# Altium PCB optoPCB.PcbDoc
Units mm, origin at the board's own origin, x right, y up, seen from the top; angles counter-clockwise.
Board outline 100 x 50 mm, 2 copper layers (Top Layer, Bottom Layer); 43 components, 22 nets, 107 pads, 16 vias.
Unrouted connection lines stored in the file: 2.
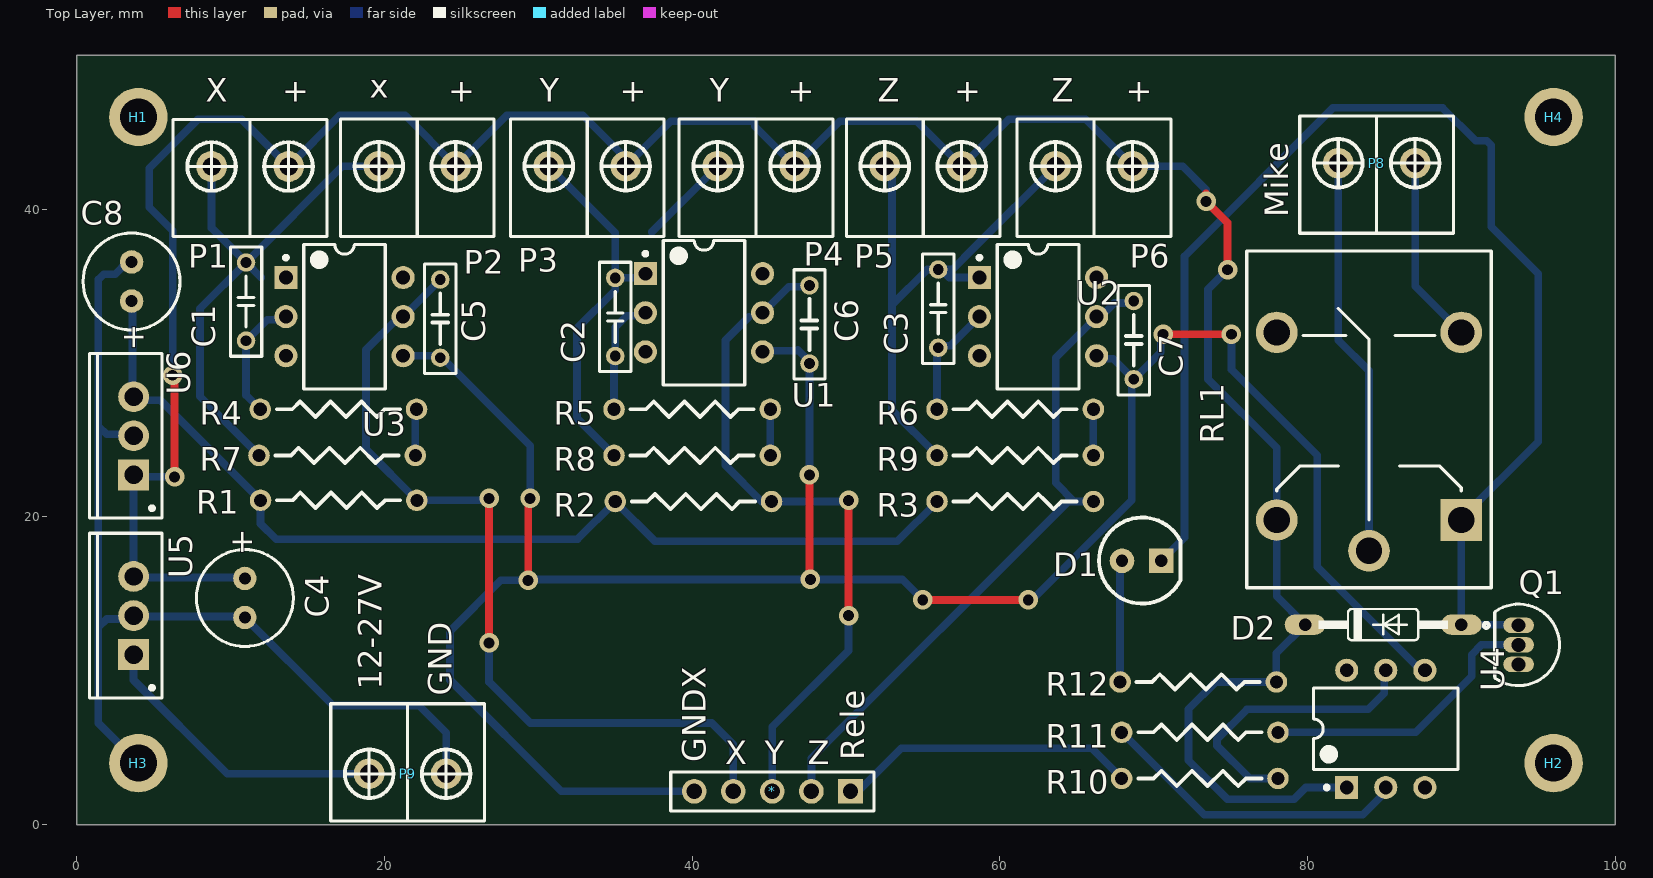
[diagram p0: Top Layer view]
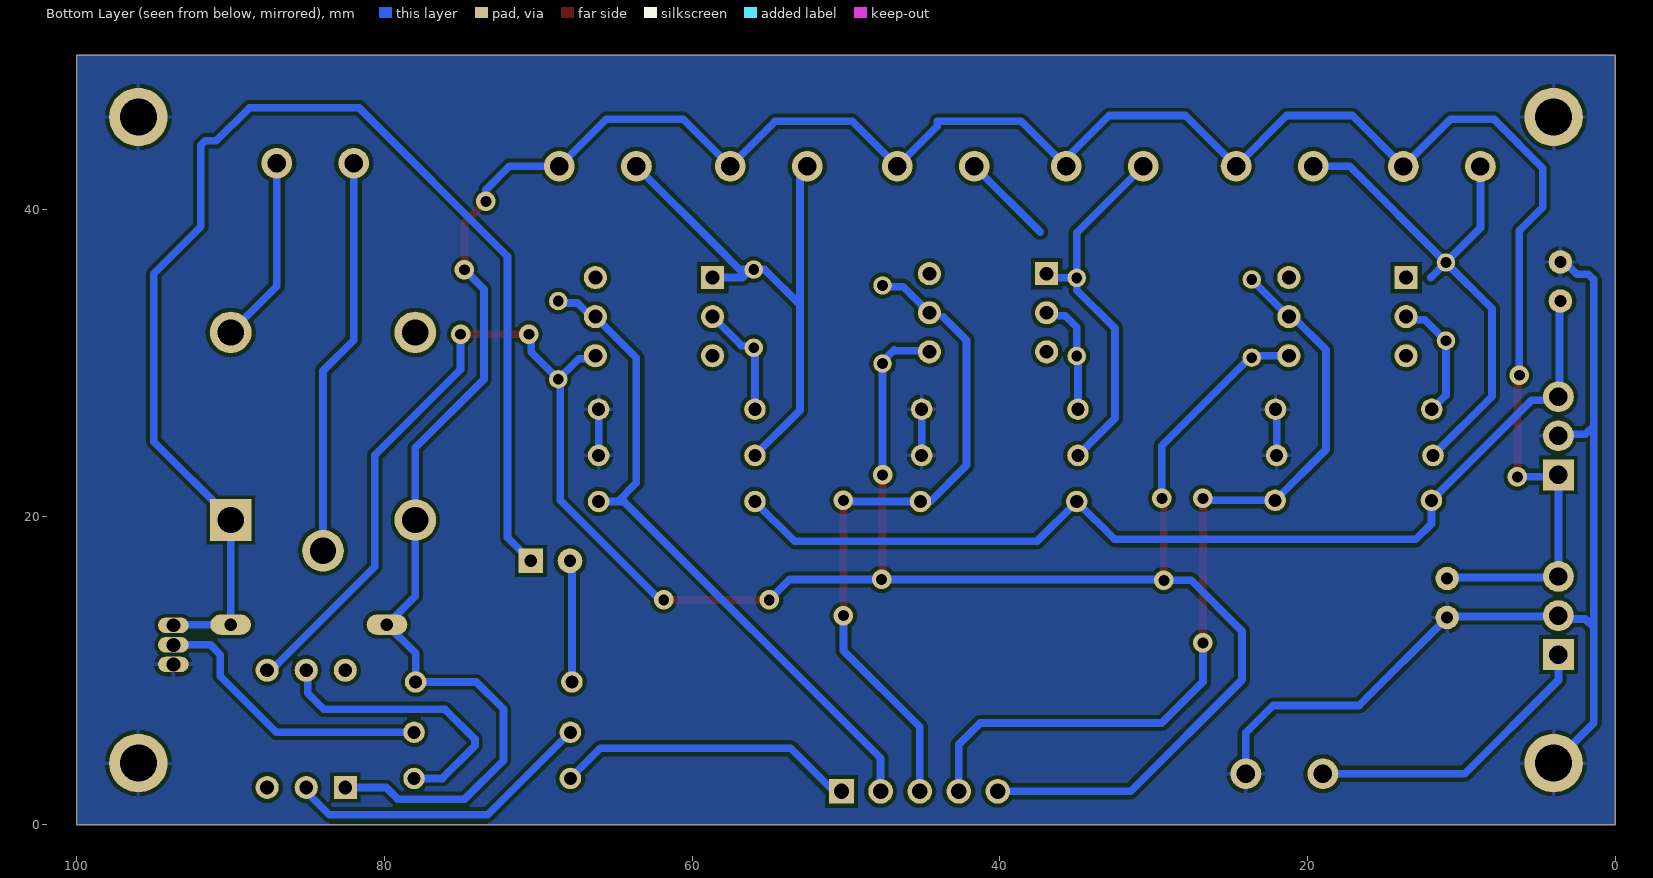
[diagram p1: Bottom Layer view, seen from below]
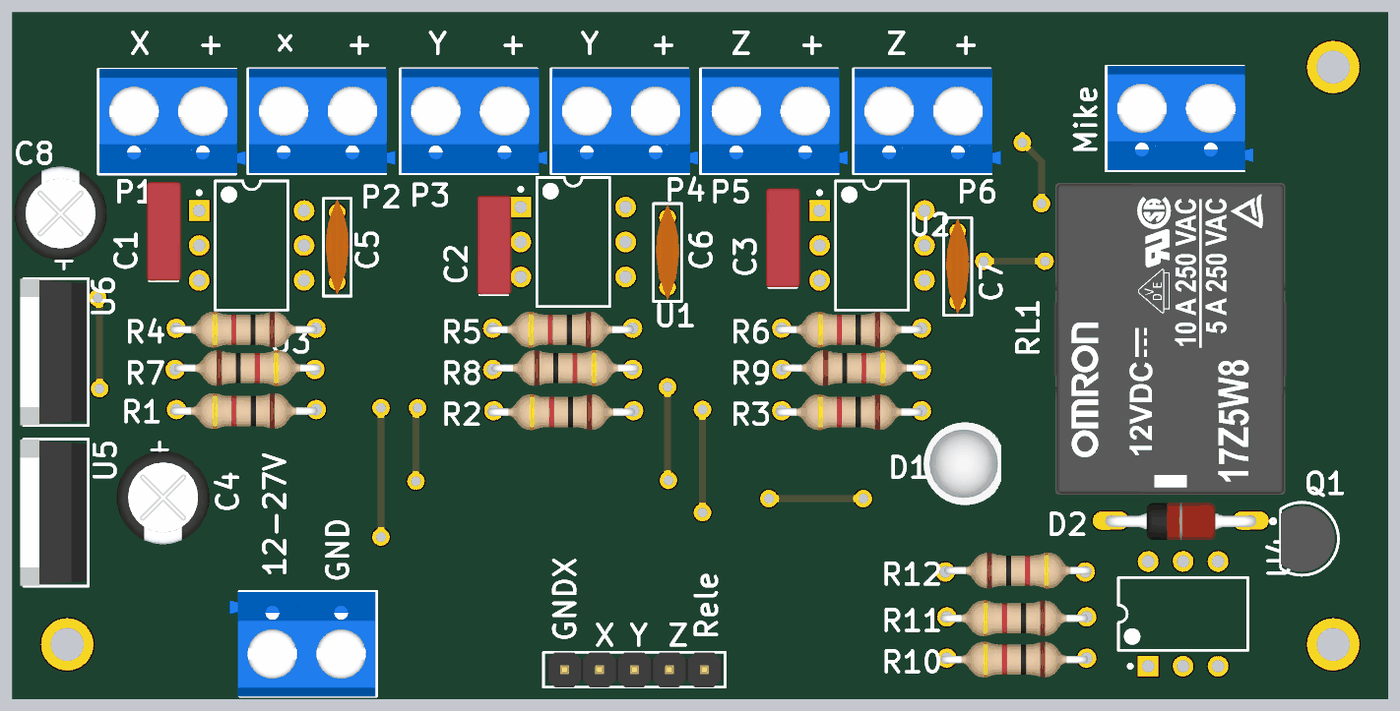
[diagram p2: 3D render of the assembled board from above, using the file's embedded part models]

## Layer stack, top to bottom
Top Solder: solder mask 0.0102, Solder Resist, Dk 3.5
Top Layer: signal copper 0.0356
Dielectric 1: dielectric 0.32, FR-4, Dk 4.8
Bottom Layer: signal copper 0.0356
Bottom Solder: solder mask 0.0102, Solder Resist, Dk 3.5

## Board outline
0,0 0,50 100,50 100,0

## Design rules (kind name [scope] priority, off if disabled: settings)
Clearance [All] p1: gap=0.254 ignorepadtopadclearanceinfootprint=FALSE except(0: Arc-Hole Track-Hole SMDPad-Hole THPad-Hole Via-Hole Fill-Hole Poly-Hole Region-Hole Text-Hole)
ComponentClearance [All] p1: gap=0.01 collisioncheckmode=3 verticalgap=0.254 showdistances=FALSE
PolygonConnect [All] p1: connectstyle=Relief reliefconductorwidth=0.254 reliefentries=4 polygonreliefangle="90 Angle" airgapwidth=0.254
RoutingVias [All] p1: holewidth=0.711 width=1.27 viastyle="Through Hole" minholewidth=0.711 minwidth=1.27 maxholewidth=0.711 maxwidth=1.27
SolderMaskExpansion [All] p1: expansion=0.102 istentingtop=FALSE
Width [All] p1: maxlimit=1.2 minlimit=0.3 preferedwidth=0.5
29 further rules are at their usual default settings.

## Components (designator, comment, footprint, x,y, rotation, side; value= is the part's Value field where it differs from the comment)
* "Header 5" HDR1X5M 50.292,2.159 r180 top
C1 "10n" Capaciotrpoliester 11,34 r90 top value=1
C2 "10n" Capaciotrpoliester 35,33 r90 top value=1
C3 "10n" Capaciotrpoliester 56,33.54 r90 top value=1
C4 "100uF" cap_rad_d6.3X11POL 10.922,14.732 r270 top
C5 "10n" RAD-0.2 23.622,32.893 r90 top value=1
C6 "10n" RAD-0.2 47.625,32.512 r90 top value=1
C7 "10n" RAD-0.2 68.707,31.496 r90 top value=1
C8 "100uF" cap_rad_d6.3X11POL 3.556,35.306 r90 top
D1 "LED" LED_5MM_GREEN 67.945,17.145 r0 top
D2 "1n4148" DIODO 79.84,13 r0 top
H1 "Hole" HOLE_M2#1 122.781,40.776 r0 top
H2 "Hole" HOLE_M2#2 96.901,3.556 r0 top
H3 "Hole" HOLE_M2#3 3.175,2.54 r0 top
H4 "Hole" HOLE_M2#4 97,47 r0 top
P1 "X+" KRE-2 16.256,46.482 r180 top
P2 "X-" KRE-2 27.129,46.499 r180 top
P3 "Y+" KRE-2 38.178,46.499 r180 top
P4 "Y-" KRE-2 49.156,46.499 r180 top
P5 "Z+" KRE-2 60.022,46.499 r180 top
P6 "Z-" KRE-2 71.127,46.499 r180 top
P8 "Mike" KRE-2 89.5,46.7 r180 top
P9 "Alimentacao" KRE-2 16.503,-0.398 r0 top
Q1 "NPN" TO-92 93.726,11.684 r180 top
R1 "10k" AXIAL-0.4 17.018,21.082 r180 top value=0
R2 "10k" AXIAL-0.4 40.08,21 r180 top value=0
R3 "10k" AXIAL-0.4 61,21 r180 top value=0
R4 "1k" AXIAL-0.4 17,27 r180 top value=0
R5 "1k" AXIAL-0.4 40,27 r180 top value=0
R6 "1k" AXIAL-0.4 61,27 r180 top value=0
R7 "10k" AXIAL-0.4 16.92,24 r0 top value=0
R8 "10k" AXIAL-0.4 40,24 r0 top value=0
R9 "10k" AXIAL-0.4 61,24 r0 top value=0
R10 "200" AXIAL-0.4 73,3 r180 top value=0
R11 "1k" AXIAL-0.4 73,6 r180 top value=0
R12 "1k" AXIAL-0.4 72.898,9.271 r0 top value=0
RL1 "Relay" FINDER-36.11 90,19.8 r90 top
U1 "4n27" DIP-6 40.767,33.274 r0 top
U2 "4n27" DIP-6 62.484,33.02 r0 top
U3 "4n27" DIP-6 17.399,33.02 r0 top
U4 "Optoisolator1" DIP-6 85.09,6.223 r90 top
U5 "LM7812" LM7805 3.683,13.589 r90 top
U6 "LM7812" LM7805 3.683,25.273 r90 top

## Footprints (in the part's own frame and the unit in brackets; to place one, negate y for a bottom-side part, rotate by r counter-clockwise, add the part's x,y. Pads: shape width x height; smd on the part's side, far side on the other; paste and mask are expansions set on the pad)
AXIAL-0.4 [mm]
  round 1.4 hole 0.85: 1(-5.08,0) 2(5.08,0)
  silkscreen extent -4,-0.5 4,0.5, body extent -5.15,-1.19 5.55,1.4, height 2.69
cap_rad_d6.3X11POL [mil]
  round 60 hole 30: 1(-50,0) 2(50,0)
  silkscreen extent -124,-124 124,124, body extent -132,-132 136,136, height 492
Capaciotrpoliester [mm] "CAP_BOX_7.2x2.5x6.5_RD"
  round 1.2 hole 0.7: 1(-2.54,0) 2(2.54,0)
  silkscreen extent -3.56,-1.02 3.56,1.02, body extent -3.56,-1.27 3.64,1.23, height 6.5
DIODO [mil]
  oval 104x52 hole 32: 1(400,0) 2(0,0)
  silkscreen extent 35,-40 365,40, body extent -15,-55 416,51, height 244
DIP-6 [mm] "DIP, 6-Pin, Row Spacing 7.62 mm, Pitch 2.54 mm"
  rect 1.5x1.5 hole 0.9: 1(-3.81,2.54)
  round 1.5 hole 0.9: 2(-3.81,0) 3(-3.81,-2.54) 4(3.81,-2.54) 5(3.81,0) 6(3.81,2.54)
  silkscreen extent -3.93,-4.7 2.65,4.7, body extent -3.55,-4.7 3.55,4.7, height 5.46
FINDER-36.11 [mm]
  rect 2.7x2.7 hole 1.7: 1(0,0)
  round 2.7 hole 1.7: 2(12.2,12) 3(12.2,0) 4(0,12) 5(-2,6)
  silkscreen extent -4.4,-1.95 17.5,13.95, body extent -4.92,-2.61 17.78,14.29, height 19
HDR1X5M [mm]
  rect 1.6x1.6 hole 1: 1(0,0)
  round 1.6 hole 1.016: 2(2.54,0) 3(5.08,0) 4(7.62,0) 5(10.16,0)
  silkscreen extent -1.52,-1.27 11.68,1.27, body extent -1.27,-1.27 11.43,1.27, height 8.6
HOLE_M2#1 [mm]
  round 3.8 hole 2.4: 1(-118.781,5.224)
HOLE_M2#2 [mm]
  round 3.8 hole 2.4: 1(-0.901,0.444)
HOLE_M2#3 [mm]
  round 3.8 hole 2.4: 1(0.825,1.46)
HOLE_M2#4 [mm]
  round 3.8 hole 2.4: 1(-1,-1)
KRE-2 [mm]
  round 2 hole 1.2: 1(2.491,3.7) 2(7.5,3.7)
  silkscreen extent 0,0.64 10,8.26, body extent -0.7,0.6 9.9,8.2, height 10
LED_5MM_GREEN [mm] "Led 5 mm"
  round 1.6 hole 0.8: 1(0,0)
  rect 1.6x1.6 hole 0.8: 2(2.54,0)
  silkscreen extent -1.49,-2.78 3.81,2.82, body extent -1.71,-3.01 3.71,3.01, height 8.81
LM7805 [mm]
  rect 2x2 hole 1.2: 1(-2.54,0)
  round 2 hole 1.2: 2(0,0) 3(2.54,0)
  silkscreen extent -5.35,-1.85 5.35,2.85, body extent -5.32,-1.7 5.33,3.1, height 19.5
RAD-0.2 [mm]
  round 1.2 hole 0.7: 1(-2.54,0) 2(2.54,0)
  silkscreen extent -3.56,-1.02 3.56,1.02, body extent -3.5,-0.85 3.5,0.85, height 7.31
TO-92 [mm] "TO, Flat Index; 3 In-Line, Axial Leads; Body Dia. 4.8mm; Leads 0.48 x 0.51 mm (max)"
  oval 2x1 hole 0.9: 1(0,-1.27) 2(0,0) 3(0,1.27)
  silkscreen extent -2.65,-2.65 2.26,2.65, body extent -2.4,-2.4 1.53,2.4, height 6

## Part data
C1 C2 C3 C5 C6 C7: library part C, "Capacitor"
C4 C8: library part CP, "Polarized Capacitor"
D2: library part D, "Diode"
P1 P2 P3 P4 P5 P6 P8 P9: library part "Header 2"
Q1: "NPN Bipolar Transistor"
R1 R2 R3 R4 R5 R6 R7 R8 R9 R10 R11 R12: library part R, "Resistor"
RL1: "SPDT Relay"
U1 U2 U3: library part Optoisolator1, "4-Pin Phototransistor Optocoupler"
U4: "4-Pin Phototransistor Optocoupler"
U5 U6: library part LM7805

## Via types
v1: diameter 1.27, hole 0.711, Top Layer to Bottom Layer, 16 vias

## Nets (pads, with @x,y where several pads share a name; then routed paths per layer and width w, separated by ;. In a path a pad name is that pad's centre, name@x,y a point inside that pad or via, vN(x,y) a via of type N, cw(c..) or ccw(c..) an arc to the next point about the centre after c; other vN are vias at no path point)
+5: C8.1 R1.2 R2.2 R3.2 U6.3 | length 66.4
  Bottom Layer w0.5: C8.1 3.62,33.972 3.62,27.877 U6.3 3.909,27.587 5.433,27.587 R1.2 11.938,19.558 12.954,18.542 32.542,18.542 R2.2 37.585,18.415 53.335,18.415 R3.2
+12: C4.1 D2.2 P1.1 P2.1 P3.1 P4.1 P5.1 P6.1 R12.2 RL1.4 U4.1 U5.3 U6.1 | length 180.9
  Top Layer w0.5: v1(6.223,29.21) 6.35,29.083 v1(6.35,22.606) ; v1@73.406,41.021 v1(73.406,40.513) 74.803,39.116 v1(74.803,36.068)
  Bottom Layer w0.5: v1(6.223,29.21) 6.223,38.608 4.699,40.132 4.699,42.672 7.874,45.847 10.7,45.847 P1.1 17.084,46.101 21.336,46.101 P2.1 27.94,46.101 32.893,46.101 35.687,43.307 P3.1 38.608,45.72 44.069,45.72 44.069,45.395 P4.1 49.586,45.72 54.61,45.72 P5.1 60.579,45.847 65.588,45.847 P6.1 71.882,42.799 73.406,41.275 v1(73.406,40.513) ; v1(6.35,22.606) 3.81,22.606 U6.1 U5.3 3.747,16.066 C4.1@10.859,16.066 ; v1(74.803,36.068) 73.533,34.798 73.533,28.956 78,24.489 RL1.4 78,14.84 D2.2 77.978,11.138 R12.2 74.041,9.271 72.263,7.493 72.263,4.191 74.803,1.651 79.125,1.651 79.887,2.413 U4.1
GND: C4.2 C8.2 H1.1 H2.1 H3.1 H4.1 P9.2 Q1.3 R4.1 R5.1 R6.1 R7.2 R8.2 R9.2 U5.2 U6.2 | length 75.8
  Bottom Layer w0.5: C8.2 3.279,36.576 2.489,35.787 1.751,35.787 1.397,35.433 1.397,25.908 ; U6.2 3.584,25.372 1.933,25.372 1.397,25.908 ; H3.1 1.397,6.603 1.397,12.827 ; R4.1 22,26.92 R7.2 R7.2@22.244,24 ; P9.2 24.003,5.969 22.225,7.747 16.637,7.747 C4.2 10.859,13.526 3.747,13.526 U5.2 3.457,13.363 1.933,13.363 1.397,12.827 ; R5.1@45,27.08 R5.1 R8.2 ; R9.2 R6.1 ; 1.397,12.827 1.397,25.908
GNDX: *.5 C5.1 C6.1 C7.1 U1.4 U2.4 U3.4 U4.4 | length 154.6
  Top Layer w0.5: v1(29.337,15.875) 29.337,21.082 v1(29.464,21.209) ; v1(47.625,22.733) 47.625,16.002 v1(47.688,15.939) ; v1(54.991,14.605) v1(61.849,14.605) ; v1(70.612,31.877) v1(75.057,31.877)
  Bottom Layer w0.5: U3.4 23.622,30.48 29.464,24.638 v1(29.464,21.209) ; C5.1@23.488,30.487 C5.1 ; *.5 31.496,2.159 24.257,9.398 24.257,12.573 27.559,15.875 v1(29.337,15.875) 29.4,15.939 v1(47.688,15.939) 53.657,15.939 v1(54.991,14.605) ; U1.4 44.64,30.797 46.799,30.797 46.863,30.861 47.625,30.099 v1(47.625,22.733) ; v1(61.849,14.605) 62.103,14.605 68.58,21.082 C7.1@68.58,28.956 ; U2.4 66.485,30.289 67.374,30.289 C7.1 70.465,30.714 70.465,31.73 v1(70.612,31.877) ; v1(75.057,31.877) 75.057,29.591 80.645,24.003 80.645,16.764 87.376,10.033 U4.4
Net*_1: *.1 R10.2 | length 19.6
  Bottom Layer w0.5: *.1 50.8,2.159 53.594,4.953 65.967,4.953 R10.2
Net*_2: *.2 C7.2 R3.1 U2.5 | length 43.9
  Bottom Layer w0.5: *.2 47.752,4.318 64.434,21 64.852,21 ; R3.1 64.852,21 ; C7.2 68.573,33.902 67.447,33.902 66.565,33.02 U2.5 63.627,30.353 63.627,22.225 64.852,21
Net*_3: *.3 C6.2 R2.1 U1.5 | length 44
  Top Layer w0.5: v1(50.165,13.589) v1(50.165,21.082)
  Bottom Layer w0.5: 43.668,33 42.164,31.496 42.164,23.368 44.532,21 R2.1 50.083,21 v1(50.165,21.082) ; U1.5 46.275,34.972 47.545,34.972 C6.2 ; *.3 45.212,6.35 50.165,11.303 v1(50.165,13.589)
Net*_4: *.4 C5.2 R1.1 U3.5 | length 55.2
  Top Layer w0.5: v1(26.797,11.811) v1(26.797,21.209)
  Bottom Layer w0.5: C5.2 U3.5 20.955,33.02 18.796,30.861 18.796,24.384 R1.1 26.67,21.082 v1(26.797,21.209) ; v1(26.797,11.811) 26.797,9.271 29.464,6.604 41.275,6.604 42.672,5.207 *.4
NetC1_1: C1.1 R4.2 U3.2 | length 8.1
  Bottom Layer w0.5: R4.2 11,27.92 C1.1 12.369,32.829 13.398,32.829 U3.2
NetC1_2: C1.2 P1.2 P2.2 R7.1 U3.1 | length 35.2
  Bottom Layer w0.5: P1.2 8.756,38.784 C1.2 ; R7.1 8,27.84 8,33.54 C1.2 ; 11.98,35.56 C1.2 ; P2.2 17.259,42.799 C1.2
NetC2_1: C2.1 R5.2 U1.2 | length 7.7
  Bottom Layer w0.5: R5.2 34.92,30.38 C2.1 35,32.333 35.75,33.083 36.766,33.083 U1.2
NetC2_2: C2.2 P3.2 P4.2 R8.1 U1.1 | length 30.7
  Bottom Layer w0.5: P3.2 35,38.477 C2.2 ; R8.1 32.512,26.408 32.512,32.258 35,34.746 C2.2 ; U1.1 36.683,35.54 C2.2 ; 37.38,38.523 P4.2
NetC3_1: C3.1 R6.2 U2.2 | length 7.5
  Bottom Layer w0.5: R6.2 55.92,30.92 C3.1 56.134,31.134 56.788,31.134 U2.2
NetC3_2: C3.2 P5.2 P6.2 R9.1 U2.1 | length 37.5
  Bottom Layer w0.5: P5.2 52.991,42.33 52.991,33.782 ; R9.1 52.991,26.929 52.991,33.782 ; U2.1 56.709,35.56 56.189,36.08 C3.2 ; P6.2 58.42,37.592 56.909,36.081 C3.2@56.001,36.081 ; 52.991,33.782 55.289,36.08 C3.2
NetD1_1: D1.1 R12.1 | length 7.9
  Bottom Layer w0.5: R12.1 67.818,17.018 D1.1
NetD1_2: D1.2 D2.1 Q1.1 RL1.1 | length 83.6
  Bottom Layer w0.5: D1.2 72.009,18.669 72.009,36.957 81.661,46.609 88.773,46.609 90.932,44.45 91.655,44.45 91.948,44.157 91.948,38.862 94.996,35.814 94.996,24.892 90,19.896 RL1.1 D2.1 93.68,13 Q1.1
NetP8_1: P8.1 RL1.3 | length 12.2
  Bottom Layer w0.5: P8.1 87.009,34.991 RL1.3
NetP8_2: P8.2 RL1.5 | length 26
  Bottom Layer w0.5: P8.2 82,31.495 84,29.495 RL1.5
NetP9_1: P9.1 U5.1 | length 19.5
  Bottom Layer w0.5: U5.1 3.683,9.398 9.779,3.302 P9.1
NetQ1_2: Q1.2 R11.1 | length 18.8
  Bottom Layer w0.5: R11.1 87.026,6 90.678,9.652 90.678,11.049 91.313,11.684 Q1.2
NetR10_1: R10.1 U4.5 | length 18.9
  Bottom Layer w0.5: R10.1 76.248,3 74.121,5.127 74.121,5.541 76.073,7.493 83.947,7.493 84.987,8.533 84.987,9.93 U4.5
NetR11_2: R11.2 U4.2 | length 20.3
  Bottom Layer w0.5: R11.2 73.285,0.635 83.583,0.635 85.09,2.142 U4.2
pads on no net: RL1.2 U1.3 U1.6 U2.3 U2.6 U3.3 U3.6 U4.3 U4.6

## Polygon pours and split planes (outlines as drawn)
GND on Bottom Layer "GND_L02_P000" (solid, pour order 0): 0,0 0,50.038 99.949,50.038 99.949,0

## Silkscreen, mask and mechanical layers (free items; w line width, h text height)
Top Overlay:
  text "x" at 19.05,47.244 h1.52
  text "X" at 8.382,46.99 h1.52
  text "+" at 13.335,46.99 h1.52
  text "+" at 24.13,46.99 h1.52
  text "Y" at 30.099,46.99 h1.52
  text "+" at 35.306,46.99 h1.52
  text "Y" at 41.148,46.99 h1.52
  text "+" at 46.228,46.99 h1.52
  text "Z" at 52.07,46.99 h1.52
  text "+" at 57.023,46.99 h1.52
  text "Z" at 63.373,46.99 h1.52
  text "+" at 68.199,46.99 h1.52
  text "12-27V" at 19.812,8.763 h1.52 r90
  text "GND" at 24.384,8.382 h1.52 r90
  text "Rele" at 51.181,4.191 h1.52 r90
  text "GNDX" at 40.894,4.064 h1.52 r90
  text "X" at 42.164,3.937 h1.52
  text "Y" at 44.704,3.937 h1.52
  text "Z" at 47.498,3.937 h1.52
Mechanical 1:
  the board outline again, w0.05

## Text inside footprints (layer, text, board x,y; h text height)
C4: Top Overlay "+" at 10.122,19.232 h1.52 r270
C8: Top Overlay "+" at 4.356,30.806 h1.52 r90